# Altium PCB 在线升级仪_定制转接板V1.1_20231208(1).PcbDoc (part 2 of 2)
Units mil, origin at the board's own origin, x right, y up, seen from the top; angles counter-clockwise.
Board outline 6299.21 x 2165.35 mil, 2 copper layers (Top Layer, Bottom Layer); 38 components, 64 nets, 286 pads, 90 vias.
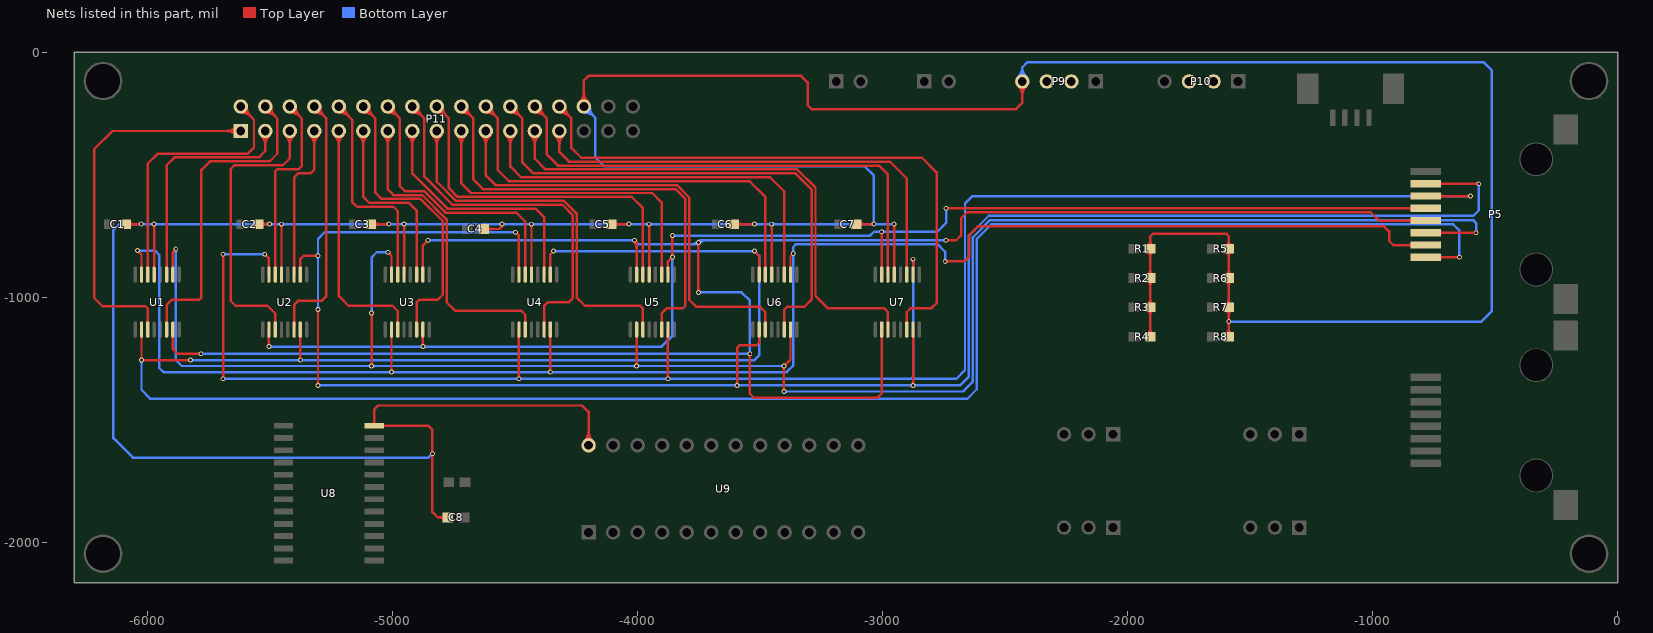
[diagram p2: the nets of this part, all layers, seen from the top]

## Via types
v1: diameter 19.68, hole 11.81, Top Layer to Bottom Layer, 90 vias

## Nets (pads, with @x,y where several pads share a name; then routed paths per layer and width w, separated by ;. In a path a pad name is that pad's centre, name@x,y a point inside that pad or via, vN(x,y) a via of type N, cw(c..) or ccw(c..) an arc to the next point about the centre after c; other vN are vias at no path point) (continued)
MISO: P5.7 U2.10 U4.15 U6.2 U7.7 | length 8311.4
  Top Layer w10: U2.10@-5376.02,-907.8 -5376.02,-844.02 -5363,-831 v1(-5304,-831) ; v1@-5307.42,-1356.58 ccw(c-5315.69,-1348.31) -5304,-1348.31 ccw(c-5292.31,-1348.31) v1@-5300.58,-1356.58 ; v1@-5307.42,-1053.42 cw(c-5315.69,-1061.69) -5304,-1061.69 cw(c-5292.31,-1061.69) v1@-5300.58,-1053.42 ; v1@-5307.42,-834.42 ccw(c-5315.69,-842.69) -5315.69,-831 ccw(c-5315.69,-819.31) v1@-5307.42,-827.58 ; v1(-5304,-1360) v1(-5304,-1050) ; v1@-4498,-739.84 cw(c-4498,-751.53) -4489.73,-743.27 cw(c-4481.47,-735) v1@-4493.16,-735 ; v1(-4498,-735) -4483.98,-749.02 U4.15@-4483.98,-907.8 ; v1@-3597.42,-1356.58 ccw(c-3605.69,-1348.31) -3594,-1348.31 ccw(c-3582.31,-1348.31) v1@-3590.58,-1356.58 ; v1(-3594,-1360) -3594,-1207 -3584,-1197 -3515,-1197 -3503.98,-1185.98 U6.2@-3503.98,-1132.2 ; v1@-2879.45,-1356.55 ccw(c-2887.71,-1348.29) -2876.02,-1348.29 ccw(c-2864.33,-1348.29) v1@-2872.6,-1356.55 ; v1(-2876.02,-1359.98) U7.7@-2876.02,-1132.2 ; P5.7@-784.66,-537.42 v1(-568,-537.42) ; P5.7@-729.98,-544.46 cw(c-712.98,-561.46) -712.98,-537.42 cw(c-712.98,-513.37) P5.7@-729.98,-530.37 ; v1@-571.42,-540.84 ccw(c-579.69,-549.11) -579.69,-537.42 ccw(c-579.69,-525.73) v1@-571.42,-533.99
  Bottom Layer w10: v1@-5307.42,-1046.58 ccw(c-5315.69,-1038.31) -5304,-1038.31 ccw(c-5292.31,-1038.31) v1@-5300.58,-1046.58 ; v1@-5307.42,-834.42 cw(c-5315.69,-842.69) -5304,-842.69 cw(c-5292.31,-842.69) v1@-5300.58,-834.42 ; v1@-5307.42,-827.58 ccw(c-5315.69,-819.31) -5304,-819.31 ccw(c-5292.31,-819.31) v1@-5300.58,-827.58 ; v1(-5304,-1360) v1(-3594,-1360) v1(-2876.02,-1359.98) -2684.98,-1359.98 -2648,-1323 -2648,-749 -2567,-668 -590,-668 -568,-646 v1(-568,-537.42) ; v1(-5304,-1050) v1(-5304,-831) -5304,-762 -5277,-735 v1(-4498,-735) ; v1@-5300.58,-1363.42 cw(c-5292.31,-1371.69) -5292.31,-1360 cw(c-5292.31,-1348.31) v1@-5300.58,-1356.58 ; v1@-4501.42,-738.42 ccw(c-4509.69,-746.69) -4509.69,-735 ccw(c-4509.69,-723.31) v1@-4501.42,-731.58 ; v1@-3597.42,-1363.42 ccw(c-3605.69,-1371.69) -3605.69,-1360 ccw(c-3605.69,-1348.31) v1@-3597.42,-1356.58 ; v1@-3590.58,-1363.42 cw(c-3582.31,-1371.69) -3582.31,-1360 cw(c-3582.31,-1348.31) v1@-3590.58,-1356.58 ; -2887.77,-1360 ccw(c-2887.77,-1348.23) v1@-2879.45,-1356.55 ; -2887.66,-1360 cw(c-2887.66,-1371.61) v1@-2879.45,-1363.4 ; v1@-2872.6,-1363.4 cw(c-2864.33,-1371.67) -2864.33,-1359.98 cw(c-2864.33,-1348.29) v1@-2872.6,-1356.55 ; v1@-571.42,-540.84 cw(c-579.69,-549.11) -568,-549.11 cw(c-556.31,-549.11) v1@-564.58,-540.84
MISO_OUT1: P11.7 U2.11 | length 797.4
  Top Layer w10: U2.11@-5401.61,-907.8 -5401.61,-511.61 -5385,-495 -5335,-495 -5318.93,-478.93 P11.7@-5318.93,-322.08 ; P11.7@-5336.28,-339.43 cw(c-5378.15,-381.3) -5318.93,-381.3 cw(c-5259.72,-381.3) P11.7@-5301.59,-339.43 ; P11.7@-5329.21,-332.36 cw(c-5354.01,-357.16) -5318.93,-357.16 cw(c-5283.86,-357.16) P11.7@-5308.66,-332.36
MISO_OUT2: P11.14 U4.14 | length 1281.2
  Top Layer w10: P11.14@-5018.93,-246.61 cw(c-5018.93,-305.83) -4977.06,-263.95 cw(c-4935.19,-222.08) P11.14@-4994.41,-222.08 ; P11.14@-5018.93,-236.61 cw(c-5018.93,-271.68) -4994.13,-246.88 cw(c-4969.33,-222.08) P11.14@-5004.41,-222.08 ; P11.14@-5018.93,-222.08 -4970,-271.02 -4970,-404 -4970,-547.31 -4950,-567.31 -4871.69,-567.31 -4784,-655 -4495,-655 -4458.39,-691.61 U4.14@-4458.39,-907.8
MISO_OUT3: P11.21 U6.3 | length 2016.8
  Top Layer w10: P11.21@-4636.28,-339.43 cw(c-4678.15,-381.3) -4618.93,-381.3 cw(c-4559.72,-381.3) P11.21@-4601.59,-339.43 ; P11.21@-4629.21,-332.36 cw(c-4654.01,-357.16) -4618.93,-357.16 cw(c-4583.86,-357.16) P11.21@-4608.66,-332.36 ; P11.21@-4618.93,-322.08 -4618.93,-504.07 -4580,-543 -3839.37,-543 -3789,-593.37 -3789,-1011 -3760,-1040 -3500,-1040 -3478.39,-1061.61 U6.3@-3478.39,-1132.2
MISO_OUT4: P11.28 U7.6 | length 2610.1
  Top Layer w10: P11.28@-4318.93,-246.61 cw(c-4318.93,-305.83) -4277.06,-263.95 cw(c-4235.19,-222.08) P11.28@-4294.41,-222.08 ; P11.28@-4318.93,-236.61 cw(c-4318.93,-271.68) -4294.13,-246.88 cw(c-4269.33,-222.08) P11.28@-4304.41,-222.08 ; P11.28@-4318.93,-222.08 -4270,-271.02 -4270,-391 -4230,-431 -2840,-431 -2780,-491 -2780,-1025 -2800,-1045 -2885,-1045 -2901.61,-1061.61 U7.6@-2901.61,-1132.2
MOSI: P5.4 U1.7 U3.10 U5.15 U7.2 | length 8963.2
  Top Layer w10: U1.7@-5896.02,-1132.2 -5896.02,-1211.98 -5877,-1231 v1(-5782,-1231) ; v1@-5785.42,-1234.42 ccw(c-5793.69,-1242.69) -5793.69,-1231 ccw(c-5793.69,-1219.31) v1@-5785.42,-1227.58 ; U3.10@-4876.02,-907.8 -4876.02,-789.02 v1(-4855,-768) ; v1@-4859.84,-768 cw(c-4871.53,-768) -4863.27,-776.27 cw(c-4855,-784.53) v1@-4855,-772.84 ; v1@-4016.42,-771.42 cw(c-4046.48,-801.48) -4003.98,-801.48 ; v1(-4013,-768) -4003.98,-777.02 U5.15@-4003.98,-907.8 ; v1@-4009.35,-764.35 cw(c-4022.33,-777.33) -4003.98,-777.33 ; v1@-3755.03,-977.19 ccw(c-3763.3,-968.92) -3751.61,-968.92 ccw(c-3739.92,-968.92) v1@-3748.19,-977.19 ; v1@-3755.03,-781.03 cw(c-3763.3,-789.3) -3751.61,-789.3 cw(c-3739.92,-789.3) v1@-3748.19,-781.03 ; v1(-3751.61,-980.61) v1(-3751.61,-777.61) ; v1@-3545.42,-1234.42 cw(c-3553.69,-1242.69) -3542,-1242.69 cw(c-3530.31,-1242.69) v1@-3538.58,-1234.42 ; v1(-3542,-1231) -3542,-1394 -3526,-1410 -3021,-1410 -3003.98,-1392.98 U7.2@-3003.98,-1132.2 ; v1(-2742.23,-767.77) -2699.77,-767.77 -2680,-748 -2680,-678.42 -2655,-653.42 -1008.58,-653.42 -974.58,-687.42 P5.4@-784.66,-687.42 ; v1@-2738.81,-771.19 cw(c-2730.54,-779.46) -2730.54,-767.77 cw(c-2730.54,-756.08) v1@-2738.81,-764.34 ; P5.4@-839.34,-694.46 ccw(c-856.35,-711.46) -856.35,-687.42 ccw(c-856.35,-663.37) P5.4@-839.34,-680.37
  Bottom Layer w10: v1(-5782,-1231) v1(-3542,-1231) -3542,-1014 -3575.39,-980.61 v1(-3751.61,-980.61) ; v1@-5778.58,-1234.42 cw(c-5770.31,-1242.69) -5770.31,-1231 cw(c-5770.31,-1219.31) v1@-5778.58,-1227.58 ; v1(-4855,-768) v1(-4013,-768) -3996,-785 -3759,-785 v1(-3751.61,-777.61) -3741.77,-767.77 v1(-2742.23,-767.77) ; v1@-4851.58,-771.42 cw(c-4843.31,-779.69) -4843.31,-768 cw(c-4843.31,-756.31) v1@-4851.58,-764.58 ; v1@-4016.42,-771.42 ccw(c-4024.69,-779.69) -4024.69,-768 ccw(c-4024.69,-756.31) v1@-4016.42,-764.58 ; v1@-4013,-772.84 cw(c-4013,-784.53) -4004.73,-776.27 cw(c-3996.47,-768) v1@-4008.16,-768 ; -3781.14,-785 ccw(c-3781.14,-748.08) v1@-3755.03,-774.19 ; v1@-3755.26,-773.96 cw(c-3740.3,-788.92) -3740.3,-767.77 ; v1@-3748.19,-984.03 cw(c-3739.92,-992.3) -3739.92,-980.61 cw(c-3739.92,-968.92) v1@-3748.19,-977.19 ; v1@-3748.19,-781.03 cw(c-3716.16,-813.06) -3716.16,-767.77 ; v1@-3545.42,-1234.42 ccw(c-3553.69,-1242.69) -3553.69,-1231 ccw(c-3553.69,-1219.31) -3545.42,-1227.58 ccw(c-3553.69,-1219.31) -3542,-1219.31 ccw(c-3530.31,-1219.31) v1@-3538.58,-1227.58 ; v1@-2745.66,-771.19 ccw(c-2753.92,-779.46) -2753.92,-767.77 ccw(c-2753.92,-756.08) v1@-2745.66,-764.34
MOSI_OUT1: P11.4 U1.6 | length 1474.1
  Top Layer w10: U1.6@-5921.61,-1132.2 -5921.61,-1031.61 -5900,-1010 -5788,-1010 -5780,-1002 -5780,-481 -5745,-446 -5501,-446 -5470,-415 -5470,-271.02 P11.4@-5518.93,-222.08 ; P11.4@-5518.93,-246.61 cw(c-5518.93,-305.83) -5477.06,-263.95 cw(c-5435.19,-222.08) P11.4@-5494.41,-222.08 ; P11.4@-5518.93,-236.61 cw(c-5518.93,-271.68) -5494.13,-246.88 cw(c-5469.33,-222.08) P11.4@-5504.41,-222.08
MOSI_OUT2: P11.11 U3.11 | length 918.5
  Top Layer w10: P11.11@-5136.28,-339.43 cw(c-5178.15,-381.3) -5118.93,-381.3 cw(c-5059.72,-381.3) P11.11@-5101.59,-339.43 ; P11.11@-5129.21,-332.36 cw(c-5154.01,-357.16) -5118.93,-357.16 cw(c-5083.86,-357.16) P11.11@-5108.66,-332.36 ; P11.11@-5118.93,-322.08 -5118.93,-591 -5094.62,-615.31 -4933,-615.31 -4901.61,-646.7 U3.11@-4901.61,-907.8
MOSI_OUT3: P11.18 U5.14 | length 1598.1
  Top Layer w10: P11.18@-4818.93,-246.61 cw(c-4818.93,-305.83) -4777.06,-263.95 cw(c-4735.19,-222.08) P11.18@-4794.41,-222.08 ; P11.18@-4818.93,-236.61 cw(c-4818.93,-271.68) -4794.13,-246.88 cw(c-4769.33,-222.08) P11.18@-4804.41,-222.08 ; P11.18@-4818.93,-222.08 -4770,-271.02 -4770,-555.37 -4734.37,-591 -4024,-591 -3978.39,-636.61 U5.14@-3978.39,-907.8
MOSI_OUT4: P11.25 U7.3 | length 2291
  Top Layer w10: P11.25@-4436.28,-339.43 cw(c-4478.15,-381.3) -4418.93,-381.3 cw(c-4359.72,-381.3) P11.25@-4401.59,-339.43 ; P11.25@-4429.21,-332.36 cw(c-4454.01,-357.16) -4418.93,-357.16 cw(c-4383.86,-357.16) P11.25@-4408.66,-332.36 ; P11.25@-4418.93,-322.08 -4418.93,-435.07 -4375,-479 -3390,-479 -3348.37,-479 -3274,-553.37 -3274,-996 -3225,-1045 -2995,-1045 -2978.39,-1061.61 U7.3@-2978.39,-1132.2
POWER: P5.1 U1.2 U2.7 U4.10 U6.15 | length 11053.8
  Top Layer w10: v1@-6027.4,-1253.58 ccw(c-6035.67,-1245.31) -6023.98,-1245.31 ccw(c-6012.29,-1245.31) -6020.55,-1253.58 ccw(c-6012.29,-1245.31) -6012.29,-1257 ccw(c-6012.29,-1268.69) v1@-6020.55,-1260.42 ; U1.2@-6023.98,-1132.2 v1(-6023.98,-1257) v1(-5824,-1257) ; v1@-5827.42,-1260.42 ccw(c-5835.69,-1268.69) -5835.69,-1257 ccw(c-5835.69,-1245.31) v1@-5827.42,-1253.58 ; v1@-5379.45,-1253.55 ccw(c-5387.71,-1245.29) -5376.02,-1245.29 ccw(c-5364.33,-1245.29) v1@-5372.6,-1253.55 ; v1(-5376.02,-1256.98) U2.7@-5376.02,-1132.2 ; U4.10@-4356.02,-907.8 -4356.02,-825.02 v1(-4343,-812) ; v1@-3523,-816.84 cw(c-3523,-828.53) -3514.73,-820.27 cw(c-3506.47,-812) v1@-3518.16,-812 ; v1(-3523,-812) -3503.98,-831.02 U6.15@-3503.98,-907.8 ; P5.1@-784.66,-837.42 v1@-647,-837.42 ; P5.1@-729.98,-844.46 cw(c-712.98,-861.46) -712.98,-837.42 cw(c-712.98,-813.37) P5.1@-729.98,-830.37 ; -659.7,-837.42 ccw(c-659.7,-824.3) v1@-650.42,-833.58 ; -657.68,-837.42 cw(c-657.68,-847.68) v1@-650.42,-840.42
  Bottom Layer w10: v1@-6027.4,-1260.42 cw(c-6035.67,-1268.69) -6023.98,-1268.69 cw(c-6012.29,-1268.69) v1@-6020.55,-1260.42 ; v1(-6023.98,-1257) -6023.98,-1378.02 -5987,-1415 -2655,-1415 -2616,-1376 -2616,-762.25 -2556.75,-703 -672,-703 -647,-728 v1(-647,-837) ; v1(-5824,-1257) -3667,-1257 ; v1@-5820.58,-1260.42 cw(c-5812.31,-1268.69) -5812.31,-1257 cw(c-5812.31,-1245.31) v1@-5820.58,-1253.58 ; -5387.77,-1257 ccw(c-5387.77,-1245.23) v1@-5379.45,-1253.55 ; -5387.66,-1257 cw(c-5387.66,-1268.61) v1@-5379.45,-1260.4 ; v1@-5372.6,-1260.4 cw(c-5364.39,-1268.61) -5364.39,-1257 ; v1@-5372.6,-1253.55 ccw(c-5364.28,-1245.23) -5364.28,-1257 ; v1(-4343,-812) v1(-3523,-812) -3504,-831 -3504,-1238 -3523,-1257 -3667,-1257 ; v1@-4339.58,-815.42 cw(c-4331.31,-823.69) -4331.31,-812 cw(c-4331.31,-800.31) v1@-4339.58,-808.58 ; -3569,-1257 -3667,-1257 ; v1@-3526.42,-815.42 ccw(c-3534.69,-823.69) -3534.69,-812 ccw(c-3534.69,-800.31) v1@-3526.42,-808.58 ; v1@-3523,-816.84 cw(c-3523,-828.53) -3514.73,-820.27 cw(c-3506.47,-812) v1@-3518.16,-812 ; v1@-650.42,-833.58 ccw(c-658.69,-825.31) -647,-825.31 ccw(c-635.31,-825.31) v1@-643.58,-833.58
POWER_OUT1: P11.1 U1.3 | length 1706.1
  Top Layer w10: U1.3@-5998.39,-1132.2 -5998.39,-1046.61 -6008,-1037 -6183,-1037 -6217,-1003 -6217,-396 -6143.08,-322.08 P11.1@-5618.93,-322.08 ; P11.1@-5636.28,-339.43 ccw(c-5678.15,-381.3) -5678.15,-322.08 ccw(c-5678.15,-262.87) P11.1@-5636.28,-304.74 ; P11.1@-5629.21,-332.36 ccw(c-5654.01,-357.16) -5654.01,-322.08 ccw(c-5654.01,-287.01) P11.1@-5629.21,-311.81
POWER_OUT2: P11.8 U2.6 | length 1188.7
  Top Layer w10: U2.6@-5401.61,-1132.2 -5401.61,-1031.61 -5385,-1015 -5290,-1015 -5270,-995 -5270,-271.02 P11.8@-5318.93,-222.08 ; P11.8@-5318.93,-246.61 cw(c-5318.93,-305.83) -5277.06,-263.95 cw(c-5235.19,-222.08) P11.8@-5294.41,-222.08 ; P11.8@-5318.93,-236.61 cw(c-5318.93,-271.68) -5294.13,-246.88 cw(c-5269.33,-222.08) P11.8@-5304.41,-222.08
POWER_OUT3: P11.15 U4.11 | length 1167.3
  Top Layer w10: P11.15@-4936.28,-339.43 cw(c-4978.15,-381.3) -4918.93,-381.3 cw(c-4859.72,-381.3) P11.15@-4901.59,-339.43 ; P11.15@-4929.21,-332.36 cw(c-4954.01,-357.16) -4918.93,-357.16 cw(c-4883.86,-357.16) P11.15@-4908.66,-332.36 ; P11.15@-4918.93,-322.08 -4918.93,-496.07 -4776,-639 -4416,-639 -4381.61,-673.39 U4.11@-4381.61,-907.8
POWER_OUT4: P11.22 U6.14 | length 1881.5
  Top Layer w10: P11.22@-4618.93,-246.61 cw(c-4618.93,-305.83) -4577.06,-263.95 cw(c-4535.19,-222.08) P11.22@-4594.41,-222.08 ; P11.22@-4618.93,-236.61 cw(c-4618.93,-271.68) -4594.13,-246.88 cw(c-4569.33,-222.08) P11.22@-4604.41,-222.08 ; P11.22@-4618.93,-222.08 -4570,-271.02 -4570,-482 -4525,-527 -3543,-527 -3478.39,-591.61 U6.14@-3478.39,-907.8
SCK: P5.5 U2.2 U3.7 U5.10 U7.15 | length 5934.8
  Top Layer w10: v1@-5507.4,-1198.55 ccw(c-5515.67,-1190.29) -5503.98,-1190.29 ccw(c-5492.29,-1190.29) v1@-5500.55,-1198.55 ; v1(-5503.98,-1201.98) U2.2@-5503.98,-1132.2 ; v1@-4879.45,-1198.55 ccw(c-4887.71,-1190.29) -4876.02,-1190.29 ccw(c-4864.33,-1190.29) v1@-4872.6,-1198.55 ; v1(-4876.02,-1201.98) U3.7@-4876.02,-1132.2 ; U5.10@-3876.02,-907.8 -3876.02,-854.02 v1(-3858,-836) v1(-3858,-749) ; v1@-3862.84,-836 cw(c-3874.53,-836) -3866.27,-844.27 cw(c-3858,-852.53) v1@-3858,-840.84 ; v1@-3861.42,-832.58 ccw(c-3869.69,-824.31) -3858,-824.31 ccw(c-3846.31,-824.31) v1@-3854.58,-832.58 ; v1@-3861.42,-752.42 cw(c-3869.69,-760.69) -3858,-760.69 cw(c-3846.31,-760.69) v1@-3854.58,-752.42 ; v1@-3007.42,-736.42 cw(c-3015.75,-744.75) -3003.98,-744.75 ; U7.15@-3003.98,-907.8 v1(-3004,-733) ; -3003.98,-744.63 cw(c-2992.37,-744.63) v1@-3000.58,-736.42 ; v1(-2741.42,-637.42) P5.5@-784.66,-637.42 ; v1@-2737.99,-640.84 cw(c-2729.73,-649.11) -2729.73,-637.42 cw(c-2729.73,-625.73) v1@-2737.99,-633.99 ; P5.5@-839.34,-644.46 ccw(c-856.35,-661.46) -856.35,-637.42 ccw(c-856.35,-613.37) P5.5@-839.34,-630.37
  Bottom Layer w10: v1(-5503.98,-1201.98) -3901.98,-1201.98 -3858,-1158 v1(-3858,-836) ; v1@-5500.55,-1205.4 cw(c-5492.29,-1213.67) -5492.29,-1201.98 cw(c-5492.29,-1190.29) v1@-5500.55,-1198.55 ; v1@-4879.45,-1205.4 ccw(c-4887.71,-1213.67) -4887.71,-1201.98 ccw(c-4887.71,-1190.29) v1@-4879.45,-1198.55 ; v1@-4872.6,-1205.4 cw(c-4864.33,-1213.67) -4864.33,-1201.98 cw(c-4864.33,-1190.29) v1@-4872.6,-1198.55 ; v1@-3861.42,-839.42 cw(c-3869.69,-847.69) -3858,-847.69 cw(c-3846.31,-847.69) v1@-3854.58,-839.42 ; v1(-3858,-749) -3051,-749 -3035,-733 v1(-3004,-733) -2777,-733 -2741.42,-697.42 v1(-2741.42,-637.42) ; v1@-3854.58,-752.42 cw(c-3846.31,-760.69) -3846.31,-749 cw(c-3846.31,-737.31) v1@-3854.58,-745.58 ; v1@-3007.42,-736.42 ccw(c-3015.69,-744.69) -3015.69,-733 ccw(c-3015.69,-721.31) v1@-3007.42,-729.58 ; v1@-3000.58,-736.42 cw(c-2992.31,-744.69) -2992.31,-733 cw(c-2992.31,-721.31) v1@-3000.58,-729.58 ; v1@-2744.84,-640.84 cw(c-2753.11,-649.11) -2741.42,-649.11 cw(c-2729.73,-649.11) v1@-2737.99,-640.84
SCK_OUT1: P11.5 U2.3 | length 1325.4
  Top Layer w10: U2.3@-5478.39,-1132.2 -5478.39,-1066.61 -5510,-1035 -5640,-1035 -5660,-1015 -5660,-477 -5645,-462 -5447,-462 -5418.93,-433.93 P11.5@-5418.93,-322.08 ; P11.5@-5436.28,-339.43 cw(c-5478.15,-381.3) -5418.93,-381.3 cw(c-5359.72,-381.3) P11.5@-5401.59,-339.43 ; P11.5@-5429.21,-332.36 cw(c-5454.01,-357.16) -5418.93,-357.16 cw(c-5383.86,-357.16) P11.5@-5408.66,-332.36
SCK_OUT2: P11.12 U3.6 | length 1374.1
  Top Layer w10: P11.12@-5118.93,-246.61 cw(c-5118.93,-305.83) -5077.06,-263.95 cw(c-5035.19,-222.08) P11.12@-5094.41,-222.08 ; P11.12@-5118.93,-236.61 cw(c-5118.93,-271.68) -5094.13,-246.88 cw(c-5069.33,-222.08) P11.12@-5104.41,-222.08 ; P11.12@-5118.93,-222.08 -5070,-271.02 -5070,-574 -5044.69,-599.31 -5002.63,-599.31 -4884.94,-599.31 -4795,-689.25 -4795,-990 -4815,-1010 -4890,-1010 -4901.61,-1021.61 U3.6@-4901.61,-1132.2
SCK_OUT3: P11.19 U5.11 | length 1505.8
  Top Layer w10: P11.19@-4736.28,-339.43 cw(c-4778.15,-381.3) -4718.93,-381.3 cw(c-4659.72,-381.3) P11.19@-4701.59,-339.43 ; P11.19@-4729.21,-332.36 cw(c-4754.01,-357.16) -4718.93,-357.16 cw(c-4683.86,-357.16) P11.19@-4708.66,-332.36 ; P11.19@-4718.93,-322.08 -4718.93,-536.07 -4680,-575 -3940,-575 -3901.61,-613.39 U5.11@-3901.61,-907.8
SCK_OUT4: P11.26 U7.14 | length 2197.9
  Top Layer w10: P11.26@-4418.93,-246.61 cw(c-4418.93,-305.83) -4377.06,-263.95 cw(c-4335.19,-222.08) P11.26@-4394.41,-222.08 ; P11.26@-4418.93,-236.61 cw(c-4418.93,-271.68) -4394.13,-246.88 cw(c-4369.33,-222.08) P11.26@-4404.41,-222.08 ; P11.26@-4418.93,-222.08 -4370,-271.02 -4370,-418 -4325,-463 -3015,-463 -2978.39,-499.61 U7.14@-2978.39,-907.8
SCL: P5.2 U1.15 U3.2 U4.7 U6.10 | length 7247.4
  Top Layer w10: v1@-6040,-814.84 cw(c-6040,-826.53) -6031.73,-818.27 cw(c-6023.47,-810) v1@-6035.16,-810 ; v1(-6040,-810) -6023.98,-826.02 U1.15@-6023.98,-907.8 ; v1@-5007.4,-1302.58 ccw(c-5015.67,-1294.31) -5003.98,-1294.31 ccw(c-4992.29,-1294.31) v1@-5000.55,-1302.58 ; v1(-5003.98,-1306) U3.2@-5003.98,-1132.2 ; v1@-4359.45,-1302.58 ccw(c-4367.71,-1294.31) -4356.02,-1294.31 ccw(c-4344.33,-1294.31) v1@-4352.6,-1302.58 ; v1(-4356.02,-1306) U4.7@-4356.02,-1132.2 ; U6.10@-3376.02,-907.8 -3376.02,-833.02 v1(-3365,-822) ; v1(-2745,-854) -2666,-854 -2646,-834 -2646,-746 -2611,-711 -955,-711 -934,-732 -934,-770 -916.58,-787.42 P5.2@-784.66,-787.42 ; v1@-2741.58,-857.42 cw(c-2733.31,-865.69) -2733.31,-854 cw(c-2733.31,-842.31) v1@-2741.58,-850.58 ; P5.2@-839.34,-794.46 ccw(c-856.35,-811.46) -856.35,-787.42 ccw(c-856.35,-763.37) P5.2@-839.34,-780.37
  Bottom Layer w10: v1(-6040,-810) -5969,-810 -5952,-827 -5952,-1282 -5952,-1288 -5934,-1306 v1(-5003.98,-1306) v1(-4356.02,-1306) -3392,-1306 -3365,-1279 v1(-3365,-822) -3365,-795.77 -3353,-783.77 -2776.23,-783.77 -2745,-815 v1(-2745,-854) ; v1@-6036.58,-813.42 cw(c-6028.31,-821.69) -6028.31,-810 cw(c-6028.31,-798.31) v1@-6036.58,-806.58 ; v1@-5007.4,-1309.42 ccw(c-5015.67,-1317.69) -5015.67,-1306 ccw(c-5015.67,-1294.31) v1@-5007.4,-1302.58 ; v1@-5000.55,-1309.42 cw(c-4992.29,-1317.69) -4992.29,-1306 cw(c-4992.29,-1294.31) v1@-5000.55,-1302.58 ; v1@-4359.45,-1309.42 ccw(c-4367.71,-1317.69) -4367.71,-1306 ccw(c-4367.71,-1294.31) v1@-4359.45,-1302.58 ; v1@-4352.6,-1309.42 cw(c-4344.33,-1317.69) -4344.33,-1306 cw(c-4344.33,-1294.31) v1@-4352.6,-1302.58 ; v1@-3368.42,-825.42 cw(c-3376.69,-833.69) -3365,-833.69 cw(c-3353.31,-833.69) v1@-3361.58,-825.42 ; v1@-3368.42,-818.58 ccw(c-3376.69,-810.31) -3365,-810.31 ccw(c-3353.31,-810.31) v1@-3361.58,-818.58 ; v1@-2748.42,-850.58 ccw(c-2756.69,-842.31) -2745,-842.31 ccw(c-2733.31,-842.31) v1@-2741.58,-850.58
SCL_OUT1: P11.2 U1.14 | length 1250.9
  Top Layer w10: U1.14@-5998.39,-907.8 -5998.39,-455 -5957.39,-414 -5590,-414 -5565,-389 -5565,-276.02 P11.2@-5618.93,-222.08 ; P11.2@-5618.93,-246.61 cw(c-5618.93,-305.83) -5577.06,-263.95 cw(c-5535.19,-222.08) P11.2@-5594.41,-222.08 ; P11.2@-5618.93,-236.61 cw(c-5618.93,-271.68) -5594.13,-246.88 cw(c-5569.33,-222.08) P11.2@-5604.41,-222.08
SCL_OUT2: P11.9 U3.3 | length 1163.3
  Top Layer w10: P11.9@-5236.28,-339.43 cw(c-5278.15,-381.3) -5218.93,-381.3 cw(c-5159.72,-381.3) P11.9@-5201.59,-339.43 ; P11.9@-5229.21,-332.36 cw(c-5254.01,-357.16) -5218.93,-357.16 cw(c-5183.86,-357.16) P11.9@-5208.66,-332.36 ; P11.9@-5218.93,-322.08 -5218.93,-996.07 -5180,-1035 -5000,-1035 -4978.39,-1056.61 U3.3@-4978.39,-1132.2
SCL_OUT3: P11.16 U4.6 | length 1689.6
  Top Layer w10: P11.16@-4918.93,-246.61 cw(c-4918.93,-305.83) -4877.06,-263.95 cw(c-4835.19,-222.08) P11.16@-4894.41,-222.08 ; P11.16@-4918.93,-236.61 cw(c-4918.93,-271.68) -4894.13,-246.88 cw(c-4869.33,-222.08) P11.16@-4904.41,-222.08 ; P11.16@-4918.93,-222.08 -4870,-271.02 -4870,-508 -4755,-623 -4307,-623 -4265,-665 -4265,-1005 -4280,-1020 -4365,-1020 -4381.61,-1036.61 U4.6@-4381.61,-1132.2
SCL_OUT4: P11.23 U6.11 | length 1791.8
  Top Layer w10: P11.23@-4536.28,-339.43 cw(c-4578.15,-381.3) -4518.93,-381.3 cw(c-4459.72,-381.3) P11.23@-4501.59,-339.43 ; P11.23@-4529.21,-332.36 cw(c-4554.01,-357.16) -4518.93,-357.16 cw(c-4483.86,-357.16) P11.23@-4508.66,-332.36 ; P11.23@-4518.93,-322.08 -4518.93,-467.07 -4475,-511 -3459,-511 -3401.61,-568.39 U6.11@-3401.61,-907.8
SDA: P5.3 U1.10 U3.15 U5.2 U6.7 | length 8157.9
  Top Layer w10: U1.10@-5896.02,-907.8 -5896.02,-816.02 v1(-5884,-804) ; v1@-5088.42,-1277.58 ccw(c-5096.69,-1269.31) -5085,-1269.31 ccw(c-5073.31,-1269.31) v1@-5081.58,-1277.58 ; v1@-5088.42,-1068.42 cw(c-5096.69,-1076.69) -5085,-1076.69 cw(c-5073.31,-1076.69) v1@-5081.58,-1068.42 ; v1(-5085,-1281) v1(-5085,-1065) ; v1@-5018,-821.84 cw(c-5018,-833.53) -5009.73,-825.27 cw(c-5001.47,-817) v1@-5013.16,-817 ; v1(-5018,-817) -5003.98,-831.02 U3.15@-5003.98,-907.8 ; v1@-4007.4,-1277.58 ccw(c-4015.67,-1269.31) -4003.98,-1269.31 ccw(c-3992.29,-1269.31) v1@-4000.55,-1277.58 ; v1(-4003.98,-1281) U5.2@-4003.98,-1132.2 ; v1@-3406.42,-1381.58 ccw(c-3414.69,-1373.31) -3403,-1373.31 ccw(c-3391.31,-1373.31) v1@-3399.58,-1381.58 ; v1@-3406.42,-1284.42 cw(c-3414.69,-1292.69) -3403,-1292.69 cw(c-3391.31,-1292.69) v1@-3399.58,-1284.42 ; v1(-3403,-1385) v1(-3403,-1281) -3376.02,-1254.02 U6.7@-3376.02,-1132.2 ; v1@-3403,-1276.16 ccw(c-3403,-1264.47) -3394.73,-1272.73 ccw(c-3386.47,-1281) v1@-3398.16,-1281 ; P5.3@-784.66,-737.42 v1(-578.42,-737.42) ; P5.3@-729.98,-744.46 cw(c-712.98,-761.46) -712.98,-737.42 cw(c-712.98,-713.37) P5.3@-729.98,-730.37 ; v1@-581.84,-740.84 ccw(c-590.11,-749.11) -590.11,-737.42 ccw(c-590.11,-725.73) v1@-581.84,-733.99
  Bottom Layer w10: v1@-5887.42,-807.42 cw(c-5895.69,-815.69) -5884,-815.69 cw(c-5872.31,-815.69) v1@-5880.58,-807.42 ; v1(-5884,-804) -5884,-1257 -5860,-1281 v1(-5085,-1281) v1(-4003.98,-1281) v1(-3403,-1281) ; v1@-5088.42,-1284.42 ccw(c-5096.69,-1292.69) -5096.69,-1281 ccw(c-5096.69,-1269.31) v1@-5088.42,-1277.58 ; v1@-5088.42,-1061.58 ccw(c-5096.69,-1053.31) -5085,-1053.31 ccw(c-5073.31,-1053.31) v1@-5081.58,-1061.58 ; v1(-5085,-1065) -5085,-838 -5064,-817 v1(-5018,-817) ; v1@-5081.58,-1284.42 cw(c-5073.31,-1292.69) -5073.31,-1281 cw(c-5073.31,-1269.31) v1@-5081.58,-1277.58 ; v1@-5021.42,-820.42 ccw(c-5029.69,-828.69) -5029.69,-817 ccw(c-5029.69,-805.31) v1@-5021.42,-813.58 ; v1@-4007.4,-1284.42 ccw(c-4015.67,-1292.69) -4015.67,-1281 ccw(c-4015.67,-1269.31) v1@-4007.4,-1277.58 ; v1@-4000.55,-1284.42 cw(c-3992.29,-1292.69) -3992.29,-1281 cw(c-3992.29,-1269.31) v1@-4000.55,-1277.58 ; v1@-3406.42,-1284.42 ccw(c-3414.69,-1292.69) -3414.69,-1281 ccw(c-3414.69,-1269.31) v1@-3406.42,-1277.58 ; v1(-3403,-1385) -2673,-1385 -2632,-1344 -2632,-755.63 -2563.37,-687 -589,-687 -578.42,-697.58 v1(-578.42,-737.42) ; v1@-3399.58,-1388.42 cw(c-3391.31,-1396.69) -3391.31,-1385 cw(c-3391.31,-1373.31) v1@-3399.58,-1381.58 ; v1@-581.84,-733.99 ccw(c-590.11,-725.73) -578.42,-725.73 ccw(c-566.73,-725.73) v1@-574.99,-733.99
SDA_OUT1: P11.3 U1.11 | length 1102.7
  Top Layer w10: U1.11@-5921.61,-907.8 -5921.61,-461.61 -5890,-430 -5545,-430 -5518.93,-403.93 P11.3@-5518.93,-322.08 ; P11.3@-5536.28,-339.43 cw(c-5578.15,-381.3) -5518.93,-381.3 cw(c-5459.72,-381.3) P11.3@-5501.59,-339.43 ; P11.3@-5529.21,-332.36 cw(c-5554.01,-357.16) -5518.93,-357.16 cw(c-5483.86,-357.16) P11.3@-5508.66,-332.36
SDA_OUT2: P11.10 U3.14 | length 1020.6
  Top Layer w10: P11.10@-5218.93,-246.61 cw(c-5218.93,-305.83) -5177.06,-263.95 cw(c-5135.19,-222.08) P11.10@-5194.41,-222.08 ; P11.10@-5218.93,-236.61 cw(c-5218.93,-271.68) -5194.13,-246.88 cw(c-5169.33,-222.08) P11.10@-5204.41,-222.08 ; P11.10@-5218.93,-222.08 -5165,-276.02 -5165,-611 -5144.69,-631.31 -4996,-631.31 -4978.39,-648.93 U3.14@-4978.39,-907.8
SDA_OUT3: P11.17 U5.3 | length 1696.3
  Top Layer w10: P11.17@-4836.28,-339.43 cw(c-4878.15,-381.3) -4818.93,-381.3 cw(c-4759.72,-381.3) P11.17@-4801.59,-339.43 ; P11.17@-4829.21,-332.36 cw(c-4854.01,-357.16) -4818.93,-357.16 cw(c-4783.86,-357.16) P11.17@-4808.66,-332.36 ; P11.17@-4818.93,-322.08 -4818.93,-529.07 -4741,-607 -4300.37,-607 -4249,-658.37 -4249,-1001 -4215,-1035 -3990,-1035 -3978.39,-1046.61 U5.3@-3978.39,-1132.2
SDA_OUT4: P11.24 U6.6 | length 2281.3
  Top Layer w10: P11.24@-4518.93,-246.61 cw(c-4518.93,-305.83) -4477.06,-263.95 cw(c-4435.19,-222.08) P11.24@-4494.41,-222.08 ; P11.24@-4518.93,-236.61 cw(c-4518.93,-271.68) -4494.13,-246.88 cw(c-4469.33,-222.08) P11.24@-4504.41,-222.08 ; P11.24@-4518.93,-222.08 -4470,-271.02 -4470,-450 -4425,-495 -3355,-495 -3290,-560 -3290,-1010 -3320,-1040 -3390,-1040 -3401.61,-1051.61 U6.6@-3401.61,-1132.2
SS: P5.6 U2.15 U4.2 U5.7 U7.10 | length 8035.1
  Top Layer w10: v1@-5694.42,-1329.58 ccw(c-5702.69,-1321.31) -5691,-1321.31 ccw(c-5679.31,-1321.31) v1@-5687.58,-1329.58 ; v1@-5694.42,-828.42 cw(c-5702.69,-836.69) -5691,-836.69 cw(c-5679.31,-836.69) v1@-5687.58,-828.42 ; v1(-5691,-1333) v1(-5691,-825) ; v1@-5521,-829.84 cw(c-5521,-841.53) -5512.73,-833.27 cw(c-5504.47,-825) v1@-5516.16,-825 ; v1(-5521,-825) -5503.98,-842.02 U2.15@-5503.98,-907.8 ; v1@-4487.42,-1329.58 ccw(c-4495.75,-1321.25) -4483.98,-1321.25 ; v1(-4484,-1333) U4.2@-4483.98,-1132.2 ; -4483.98,-1321.37 ccw(c-4472.37,-1321.37) v1@-4480.58,-1329.58 ; v1@-3879.45,-1329.55 ccw(c-3887.71,-1321.29) -3876.02,-1321.29 ccw(c-3864.33,-1321.29) v1@-3872.6,-1329.55 ; v1(-3876.02,-1332.98) U5.7@-3876.02,-1132.2 ; v1@-2879.45,-848.45 cw(c-2887.71,-856.71) -2876.02,-856.71 cw(c-2864.33,-856.71) v1@-2872.6,-848.45 ; U7.10@-2876.02,-907.8 v1(-2876.02,-845.02) ; P5.6@-784.66,-587.42 v1(-601.58,-587.42) ; P5.6@-729.98,-594.46 cw(c-712.98,-611.46) -712.98,-587.42 cw(c-712.98,-563.37) P5.6@-729.98,-580.37 ; v1@-605.01,-590.84 ccw(c-613.27,-599.11) -613.27,-587.42 ccw(c-613.27,-575.73) v1@-605.01,-583.99
  Bottom Layer w10: v1(-5691,-1333) v1(-4484,-1333) -2884,-1333 ; v1(-5691,-825) v1(-5521,-825) ; v1@-5687.58,-1336.42 cw(c-5679.31,-1344.69) -5679.31,-1333 cw(c-5679.31,-1321.31) v1@-5687.58,-1329.58 ; v1@-5687.58,-828.42 cw(c-5679.31,-836.69) -5679.31,-825 cw(c-5679.31,-813.31) v1@-5687.58,-821.58 ; v1@-5524.42,-828.42 ccw(c-5532.69,-836.69) -5532.69,-825 ccw(c-5532.69,-813.31) v1@-5524.42,-821.58 ; v1@-4487.42,-1336.42 ccw(c-4495.69,-1344.69) -4495.69,-1333 ccw(c-4495.69,-1321.31) v1@-4487.42,-1329.58 ; v1@-4480.58,-1336.42 cw(c-4472.31,-1344.69) -4472.31,-1333 cw(c-4472.31,-1321.31) v1@-4480.58,-1329.58 ; -3887.77,-1333 ccw(c-3887.77,-1321.23) v1@-3879.45,-1329.55 ; -3887.66,-1333 cw(c-3887.66,-1344.61) v1@-3879.45,-1336.4 ; v1@-3872.6,-1336.4 cw(c-3864.39,-1344.61) -3864.39,-1333 ; v1@-3872.6,-1329.55 ccw(c-3864.28,-1321.23) -3864.28,-1333 ; v1@-2879.45,-848.45 cw(c-2887.71,-856.71) -2876.02,-856.71 cw(c-2864.33,-856.71) v1@-2872.6,-848.45 ; v1(-2876.02,-845.02) -2876.02,-1325.02 -2884,-1333 ; v1@-605.01,-590.84 ccw(c-613.27,-599.11) -613.27,-587.42 ccw(c-613.27,-575.73) v1@-605.01,-583.99 ; v1(-601.58,-587.42) -2634,-587.42 -2664,-617.42 -2664,-1298 -2699,-1333 -2884,-1333
SS_OUT1: P11.6 U2.14 | length 949.9
  Top Layer w10: U2.14@-5478.39,-907.8 -5478.39,-548.39 -5478.39,-486.39 -5470,-478 -5383,-478 -5370,-465 -5370,-271.02 P11.6@-5418.93,-222.08 ; P11.6@-5418.93,-246.61 cw(c-5418.93,-305.83) -5377.06,-263.95 cw(c-5335.19,-222.08) P11.6@-5394.41,-222.08 ; P11.6@-5418.93,-236.61 cw(c-5418.93,-271.68) -5394.13,-246.88 cw(c-5369.33,-222.08) P11.6@-5404.41,-222.08
SS_OUT2: P11.13 U4.3 | length 1417.5
  Top Layer w10: P11.13@-5036.28,-339.43 cw(c-5078.15,-381.3) -5018.93,-381.3 cw(c-4959.72,-381.3) P11.13@-5001.59,-339.43 ; P11.13@-5029.21,-332.36 cw(c-5054.01,-357.16) -5018.93,-357.16 cw(c-4983.86,-357.16) P11.13@-5008.66,-332.36 ; P11.13@-5018.93,-322.08 -5018.93,-560.38 -4996,-583.31 -4878.31,-583.31 -4779,-682.63 -4779,-749 -4779,-1021 -4745,-1055 -4475,-1055 -4458.39,-1071.61 U4.3@-4458.39,-1132.2
SS_OUT3: P11.20 U5.6 | length 1974.7
  Top Layer w10: P11.20@-4718.93,-246.61 cw(c-4718.93,-305.83) -4677.06,-263.95 cw(c-4635.19,-222.08) P11.20@-4694.41,-222.08 ; P11.20@-4718.93,-236.61 cw(c-4718.93,-271.68) -4694.13,-246.88 cw(c-4669.33,-222.08) P11.20@-4704.41,-222.08 ; P11.20@-4718.93,-222.08 -4670,-271.02 -4670,-520 -4631,-559 -3846,-559 -3805,-600 -3805,-1035 -3815,-1045 -3880,-1045 -3901.61,-1066.61 U5.6@-3901.61,-1132.2
SS_OUT4: P11.27 U7.11 | length 2087.7
  Top Layer w10: P11.27@-4336.28,-339.43 cw(c-4378.15,-381.3) -4318.93,-381.3 cw(c-4259.72,-381.3) P11.27@-4301.59,-339.43 ; P11.27@-4329.21,-332.36 cw(c-4354.01,-357.16) -4318.93,-357.16 cw(c-4283.86,-357.16) P11.27@-4308.66,-332.36 ; P11.27@-4318.93,-322.08 -4318.93,-408.07 -4280,-447 -2971,-447 -2901.61,-516.39 U7.11@-2901.61,-907.8
STM_SWCLK: P9.3
STM_SWDIO: P9.2
UD+: P10.2
UD-: P10.3
VCC: C1.1 C2.1 C3.1 C4.1 C5.1 C6.1 C7.1 C8.2 P9.1 P11.30 R1.1 R2.1 R3.1 R4.1 R5.1 R6.1 R7.1 R8.1 U1.13 U2.13 U3.13 U4.13 U5.13 U6.13 U7.13 U8.24 U9.24 | length 20891.2
  Top Layer w10: C1.1@-6088.07,-701.9 v1(-6025.1,-701.9) ; C1.1@-6075.72,-712.28 cw(c-6050.65,-737.35) -6050.65,-701.9 cw(c-6050.65,-666.45) C1.1@-6075.72,-691.51 ; v1@-6028.53,-705.32 ccw(c-6036.79,-713.59) -6036.79,-701.9 ccw(c-6036.79,-690.21) v1@-6028.53,-698.47 ; v1@-5976.22,-705.42 cw(c-5984.49,-713.69) -5972.8,-713.69 cw(c-5961.1,-713.69) v1@-5969.37,-705.42 ; U1.13@-5972.8,-907.8 v1(-5972.8,-702) ; C2.1@-5548.07,-701.9 v1(-5502,-701.9) ; C2.1@-5535.72,-712.28 cw(c-5510.65,-737.35) -5510.65,-701.9 cw(c-5510.65,-666.45) C2.1@-5535.72,-691.51 ; v1@-5505.42,-705.32 ccw(c-5513.69,-713.59) -5513.69,-701.9 ccw(c-5513.69,-690.21) v1@-5505.42,-698.47 ; v1@-5456.22,-705.63 cw(c-5464.49,-713.9) -5452.8,-713.9 cw(c-5441.1,-713.9) v1@-5449.37,-705.63 ; U2.13@-5452.8,-907.8 v1(-5452.8,-702.2) ; C3.1@-5088.07,-701.9 v1(-5014.9,-701.9) ; U8.24@-5079.82,-1520.18 ccw(c-5091.44,-1508.56) -5075,-1508.56 ccw(c-5058.56,-1508.56) U8.24@-5070.18,-1520.18 ; C3.1@-5075.72,-712.28 cw(c-5050.65,-737.35) -5050.65,-701.9 cw(c-5050.65,-666.45) C3.1@-5075.72,-691.51 ; U8.24@-5042.62,-1529.82 cw(c-5031,-1541.44) -5031,-1525 cw(c-5031,-1508.56) U8.24@-5042.62,-1520.18 ; v1@-5018.32,-705.32 ccw(c-5026.59,-713.59) -5026.59,-701.9 ccw(c-5026.59,-690.21) v1@-5018.32,-698.47 ; v1@-4956.22,-704.63 cw(c-4964.49,-712.9) -4952.8,-712.9 cw(c-4941.1,-712.9) v1@-4949.37,-704.63 ; U3.13@-4952.8,-907.8 v1(-4952.8,-701.2) ; v1@-4840.42,-1642.42 cw(c-4848.69,-1650.69) -4837,-1650.69 cw(c-4825.31,-1650.69) v1@-4833.58,-1642.42 ; v1@-4840.42,-1635.58 ccw(c-4848.69,-1627.31) -4837,-1627.31 ccw(c-4825.31,-1627.31) v1@-4833.58,-1635.58 ; C8.2@-4786.35,-1909.28 ccw(c-4811.42,-1934.35) -4811.42,-1898.9 ccw(c-4811.42,-1863.45) C8.2@-4786.35,-1888.51 ; C8.2@-4774,-1898.9 -4815.1,-1898.9 -4837,-1877 v1(-4837,-1639) -4837,-1541 -4853,-1525 U8.24@-5075,-1525 -5075,-1458 -5059,-1442 -4226,-1442 -4200,-1468 U9.24@-4200,-1604.88 ; C4.1@-4628.07,-721.9 -4563.9,-721.9 -4553,-711 v1(-4553,-702) ; C4.1@-4615.72,-732.28 cw(c-4590.65,-757.35) -4590.65,-721.9 cw(c-4590.65,-686.45) C4.1@-4615.72,-711.51 ; -4559.4,-717.4 ccw(c-4567.43,-709.37) v1@-4557.31,-704.2 ; v1@-4436.22,-705.63 cw(c-4444.49,-713.9) -4432.8,-713.9 cw(c-4421.1,-713.9) v1@-4429.37,-705.63 ; U4.13@-4432.8,-907.8 v1(-4432.8,-702.2) ; P11.30@-4236.28,-204.74 ccw(c-4278.15,-162.87) -4218.93,-162.87 ccw(c-4159.72,-162.87) P11.30@-4201.59,-204.74 ; P11.30@-4229.21,-211.81 ccw(c-4254.01,-187.01) -4218.93,-187.01 ccw(c-4183.86,-187.01) P11.30@-4208.66,-211.81 ; P11.30@-4218.93,-222.08 -4218.93,-114.93 -4201,-97 -3333,-97 -3306,-124 -3306,-216.37 -3288.37,-234 -2458,-234 -2430,-206 P9.1@-2430,-120 ; U9.24@-4217.34,-1587.54 ccw(c-4259.21,-1545.67) -4200,-1545.67 ccw(c-4140.79,-1545.67) U9.24@-4182.66,-1587.54 ; U9.24@-4210.27,-1594.61 ccw(c-4235.07,-1569.81) -4200,-1569.81 ccw(c-4164.93,-1569.81) U9.24@-4189.73,-1594.61 ; C5.1@-4108.07,-701.9 v1(-4035.1,-701.9) ; C5.1@-4095.72,-712.28 cw(c-4070.65,-737.35) -4070.65,-701.9 cw(c-4070.65,-666.45) C5.1@-4095.72,-691.51 ; v1@-4038.53,-705.32 ccw(c-4046.79,-713.59) -4046.79,-701.9 ccw(c-4046.79,-690.21) v1@-4038.53,-698.47 ; v1@-3956.22,-705.63 cw(c-3964.49,-713.9) -3952.8,-713.9 cw(c-3941.1,-713.9) v1@-3949.37,-705.63 ; U5.13@-3952.8,-907.8 v1(-3952.8,-702.2) ; C6.1@-3608.07,-701.9 -3523.1,-701.9 v1(-3523,-702) ; C6.1@-3595.72,-712.28 cw(c-3570.65,-737.35) -3570.65,-701.9 cw(c-3570.65,-666.45) C6.1@-3595.72,-691.51 ; -3534.94,-701.9 cw(c-3534.94,-713.94) v1@-3526.42,-705.42 ; -3534.44,-701.9 ccw(c-3534.44,-690.56) v1@-3526.42,-698.58 ; v1@-3456.22,-705.63 cw(c-3464.49,-713.9) -3452.8,-713.9 cw(c-3441.1,-713.9) v1@-3449.37,-705.63 ; U6.13@-3452.8,-907.8 v1(-3452.8,-702.2) ; C7.1@-3108.07,-701.9 v1(-3036.1,-701.9) v1@-3036,-702 ; C7.1@-3095.72,-712.28 cw(c-3070.65,-737.35) -3070.65,-701.9 cw(c-3070.65,-666.45) C7.1@-3095.72,-691.51 ; v1@-3039.53,-705.32 ccw(c-3047.79,-713.59) -3047.79,-701.9 ccw(c-3047.79,-690.21) v1@-3039.53,-698.47 ; v1@-2956.42,-705.32 cw(c-2965.19,-714.08) -2952.8,-714.08 ; U7.13@-2952.8,-907.8 v1@-2952.8,-702.2 ; -2952.8,-713.09 cw(c-2941.8,-713.09) v1@-2949.58,-705.32 ; P9.1@-2447.34,-137.34 cw(c-2489.21,-179.21) -2430,-179.21 cw(c-2370.79,-179.21) P9.1@-2412.66,-137.34 ; P9.1@-2440.27,-130.27 cw(c-2465.07,-155.07) -2430,-155.07 cw(c-2394.93,-155.07) P9.1@-2419.73,-130.27 ; R4.1@-1918.45,-1151.51 ccw(c-1943.52,-1126.45) -1908.07,-1126.45 ccw(c-1872.62,-1126.45) R4.1@-1897.69,-1151.51 ; R3.1@-1918.45,-1052.28 cw(c-1943.52,-1077.35) -1908.07,-1077.35 cw(c-1872.62,-1077.35) R3.1@-1897.69,-1052.28 ; R3.1@-1918.45,-1031.51 ccw(c-1943.52,-1006.45) -1908.07,-1006.45 ccw(c-1872.62,-1006.45) R3.1@-1897.69,-1031.51 ; R2.1@-1918.45,-932.28 cw(c-1943.52,-957.35) -1908.07,-957.35 cw(c-1872.62,-957.35) R2.1@-1897.69,-932.28 ; R2.1@-1918.45,-911.51 ccw(c-1943.52,-886.45) -1908.07,-886.45 ccw(c-1872.62,-886.45) R2.1@-1897.69,-911.51 ; R1.1@-1918.45,-812.28 cw(c-1943.52,-837.35) -1908.07,-837.35 cw(c-1872.62,-837.35) R1.1@-1897.69,-812.28 ; R1.1@-1918.45,-791.51 ccw(c-1943.52,-766.45) -1908.07,-766.45 ccw(c-1872.62,-766.45) R1.1@-1897.69,-791.51 ; R4.1@-1908.07,-1161.9 R3.1@-1908.07,-1041.9 R2.1@-1908.07,-921.9 R1.1@-1908.07,-801.9 -1908.07,-752.07 -1898,-742 -1597,-742 -1588.07,-750.93 R5.1@-1588.07,-801.9 R6.1@-1588.07,-921.9 R7.1@-1588.07,-1041.9 v1(-1588.07,-1100) R8.1@-1588.07,-1161.9 ; R8.1@-1598.45,-1151.51 ccw(c-1623.52,-1126.45) -1588.07,-1126.45 ccw(c-1552.62,-1126.45) R8.1@-1577.69,-1151.51 ; R7.1@-1598.45,-1052.28 cw(c-1623.52,-1077.35) -1588.07,-1077.35 cw(c-1552.62,-1077.35) R7.1@-1577.69,-1052.28 ; R7.1@-1598.45,-1031.51 ccw(c-1623.52,-1006.45) -1588.07,-1006.45 ccw(c-1552.62,-1006.45) R7.1@-1577.69,-1031.51 ; R6.1@-1598.45,-932.28 cw(c-1623.52,-957.35) -1588.07,-957.35 cw(c-1552.62,-957.35) R6.1@-1577.69,-932.28 ; R6.1@-1598.45,-911.51 ccw(c-1623.52,-886.45) -1588.07,-886.45 ccw(c-1552.62,-886.45) R6.1@-1577.69,-911.51 ; R5.1@-1598.45,-812.28 cw(c-1623.52,-837.35) -1588.07,-837.35 cw(c-1552.62,-837.35) R5.1@-1577.69,-812.28 ; R5.1@-1598.45,-791.51 ccw(c-1623.52,-766.45) -1588.07,-766.45 ccw(c-1552.62,-766.45) R5.1@-1577.69,-791.51 ; v1@-1591.5,-1103.42 cw(c-1599.76,-1111.69) -1588.07,-1111.69 cw(c-1576.38,-1111.69) v1@-1584.65,-1103.42 ; v1@-1591.5,-1096.58 ccw(c-1599.76,-1088.31) -1588.07,-1088.31 ccw(c-1576.38,-1088.31) v1@-1584.65,-1096.58
  Bottom Layer w10: v1@-6028.53,-705.32 ccw(c-6036.79,-713.59) -6036.79,-701.9 ccw(c-6036.79,-690.21) v1@-6028.53,-698.47 ; v1@-6021.68,-705.32 cw(c-6013.41,-713.59) -6013.41,-701.9 cw(c-6013.41,-690.21) v1@-6021.68,-698.47 ; -5984.73,-701.9 cw(c-5984.73,-713.93) v1@-5976.22,-705.42 ; -5984.24,-701.9 ccw(c-5984.24,-690.55) v1@-5976.22,-698.58 ; v1@-5969.37,-705.42 cw(c-5960.86,-713.93) -5960.86,-701.9 ; v1@-5969.37,-698.58 ccw(c-5961.35,-690.55) -5961.35,-701.9 ; v1@-5505.42,-705.32 ccw(c-5513.69,-713.59) -5513.69,-701.9 ccw(c-5513.69,-690.21) v1@-5505.42,-698.47 ; v1@-5498.58,-705.32 cw(c-5490.31,-713.59) -5490.31,-701.9 cw(c-5490.31,-690.21) v1@-5498.58,-698.47 ; -5465.23,-701.9 cw(c-5465.23,-714.64) v1@-5456.22,-705.63 ; -5463.74,-701.9 ccw(c-5463.74,-691.26) v1@-5456.22,-698.78 ; v1@-5449.37,-705.63 cw(c-5440.36,-714.64) -5440.36,-701.9 ; v1@-5449.37,-698.78 ccw(c-5441.85,-691.26) -5441.85,-701.9 ; v1@-5018.32,-705.32 ccw(c-5026.59,-713.59) -5026.59,-701.9 ccw(c-5026.59,-690.21) v1@-5018.32,-698.47 ; v1@-5011.47,-705.32 cw(c-5003.21,-713.59) -5003.21,-701.9 cw(c-5003.21,-690.21) v1@-5011.47,-698.47 ; -4966.16,-701.9 ccw(c-4966.16,-687.84) v1@-4956.22,-697.78 ; -4962.81,-701.9 cw(c-4962.81,-711.22) v1@-4956.22,-704.63 ; v1@-4949.37,-704.63 cw(c-4942.78,-711.22) -4942.78,-701.9 ; v1@-4949.37,-697.78 ccw(c-4939.43,-687.84) -4939.43,-701.9 ; v1@-4841.84,-1639 cw(c-4853.53,-1639) -4845.27,-1647.27 cw(c-4837,-1655.53) v1@-4837,-1643.84 ; v1(-4837,-1639) -4853,-1655 -6059.37,-1655 -6139,-1575.37 -6139,-726 -6114.9,-701.9 v1(-6025.1,-701.9) v1(-5502,-701.9) v1(-5014.9,-701.9) -4553,-701.9 v1(-4035.1,-701.9) -3523,-701.9 v1(-3036.1,-701.9) v1@-3036,-701.9 ; -4564.94,-701.9 cw(c-4564.94,-713.94) v1@-4556.42,-705.42 ; -4564.44,-701.9 ccw(c-4564.44,-690.56) v1@-4556.42,-698.58 ; v1@-4549.58,-705.42 cw(c-4541.06,-713.94) -4541.06,-701.9 ; v1@-4549.58,-698.58 ccw(c-4541.56,-690.56) -4541.56,-701.9 ; -4445.23,-701.9 cw(c-4445.23,-714.64) v1@-4436.22,-705.63 ; -4443.74,-701.9 ccw(c-4443.74,-691.26) v1@-4436.22,-698.78 ; v1@-4429.37,-705.63 cw(c-4420.36,-714.64) -4420.36,-701.9 ; v1@-4429.37,-698.78 ccw(c-4421.85,-691.26) -4421.85,-701.9 ; P11.30@-4218.93,-246.61 cw(c-4218.93,-305.83) -4177.06,-263.95 cw(c-4135.19,-222.08) P11.30@-4194.41,-222.08 ; P11.30@-4218.93,-236.61 cw(c-4218.93,-271.68) -4194.13,-246.88 cw(c-4169.33,-222.08) P11.30@-4204.41,-222.08 ; P11.30@-4218.93,-222.08 -4172,-269.02 -4172,-431 -4136,-467 -3073,-467 -3036,-504 v1@-3036,-701.9 ; v1@-4038.53,-705.32 ccw(c-4046.79,-713.59) -4046.79,-701.9 ccw(c-4046.79,-690.21) v1@-4038.53,-698.47 ; v1@-4031.68,-705.32 cw(c-4023.41,-713.59) -4023.41,-701.9 cw(c-4023.41,-690.21) v1@-4031.68,-698.47 ; -3965.23,-701.9 cw(c-3965.23,-714.64) v1@-3956.22,-705.63 ; -3963.74,-701.9 ccw(c-3963.74,-691.26) v1@-3956.22,-698.78 ; v1@-3949.37,-705.63 cw(c-3940.36,-714.64) -3940.36,-701.9 ; v1@-3949.37,-698.78 ccw(c-3941.85,-691.26) -3941.85,-701.9 ; -3534.94,-701.9 cw(c-3534.94,-713.94) v1@-3526.42,-705.42 ; -3534.44,-701.9 ccw(c-3534.44,-690.56) v1@-3526.42,-698.58 ; v1@-3519.58,-705.42 cw(c-3511.06,-713.94) -3511.06,-701.9 ; v1@-3519.58,-698.58 ccw(c-3511.56,-690.56) -3511.56,-701.9 ; -3465.23,-701.9 cw(c-3465.23,-714.64) v1@-3456.22,-705.63 ; -3463.74,-701.9 ccw(c-3463.74,-691.26) v1@-3456.22,-698.78 ; v1@-3449.37,-705.63 cw(c-3440.36,-714.64) -3440.36,-701.9 ; v1@-3449.37,-698.78 ccw(c-3441.85,-691.26) -3441.85,-701.9 ; v1@-3039.53,-705.32 ccw(c-3047.79,-713.59) -3047.79,-701.9 ccw(c-3047.79,-690.21) -3039.53,-698.47 ccw(c-3048.04,-689.96) -3036,-689.96 ; -3036,-690.45 ccw(c-3024.66,-690.45) -3032.68,-698.47 ccw(c-3024.41,-690.21) -3024.41,-701.9 ccw(c-3024.41,-713.59) v1@-3032.68,-705.32 ; v1@-2956.42,-705.32 ccw(c-2964.69,-713.59) -2964.69,-701.9 ccw(c-2964.69,-690.21) v1@-2956.42,-698.47 ; v1(-2953,-701.9) v1@-3036,-701.9 ; P9.1@-2447.08,-102.4 ccw(c-2486.31,-62) -2430,-62 ; P9.1@-2440.12,-109.58 ccw(c-2463.35,-85.65) -2430,-85.65 ccw(c-2396.65,-85.65) P9.1@-2419.88,-109.58 ; P9.1@-2430,-120 -2430,-62 ; P9.1@-2412.92,-102.4 cw(c-2373.69,-62) -2430,-62 ; v1(-1588.07,-1100) -557,-1100 -514,-1057 -514,-75 -548,-41 -2409,-41 -2430,-62 ; v1@-1584.65,-1103.42 cw(c-1576.38,-1111.69) -1576.38,-1100 cw(c-1576.38,-1088.31) v1@-1584.65,-1096.58
pads on no net: P5.0 P6.0 P7.0 P11.34 U1.4 U1.12 U2.4 U2.12 U3.4 U3.12 U4.4 U4.12 U5.4 U5.12 U6.4 U6.12 U7.4 U7.12 U8.5 U8.6 U8.7 U8.8 U8.9 U8.10 U8.11 U8.13 U8.14 U8.15 U8.16 U8.17 U9.3 U9.4 U9.5 U9.6 U9.7 U9.8 U9.9 U9.10 U9.13

## Polygon pours and split planes (outlines as drawn)
GND on Bottom Layer "Top Layer-No Net" (solid): -6299.21,0 -6299.21,-2165.35 0,-2165.35 0,0 -6299.21,0
GND on Top Layer "Top Layer-No Net" (solid): -6299.21,0 -6299.21,-2165.35 0,-2165.35 0,0 -6299.21,0

## Keep-outs
Keep-Out Layer:
  the board outline again, w10

## Silkscreen, mask and mechanical layers (free items; w line width, h text height)
Top Overlay:
  text "IIC" at -700,-310 h40
  text "KEY" at -3200,-320 h40
  text "KEY" at -2830,-320 h40
  text "VCC" at -2490,-325 h40
  text "GND" at -2180,-325 h40
  text "5V" at -1885,-325 h40
  text "GND" at -1600,-325 h40
  text "升级仪烧录架转接板_V1.1_20231208" at -2559,-554 h90
  text "MODIF" at -735,-1165 h40
  text "LED3" at -1230,-1572 h40
  text "LED1" at -2464,-1580 h40
  text "LED4" at -1232,-1956 h40
  text "LED2" at -2482,-1962 h40

## Text inside footprints (layer, text, board x,y; h text height)
P11: Top Overlay "1" at -5718.93,-342.08 h30; Top Overlay "2" at -5718.93,-242.08 h30; Top Overlay "33" at -3940,-340 h30; Top Overlay "34" at -3940,-235 h30